# Altium PCB PCB1.PcbDoc
Units mil, origin at the board's own origin, x right, y up, seen from the top; angles counter-clockwise.
Board outline 3950.53 x 3947.04 mil, 2 copper layers (Top Layer, Bottom Layer); 124 components, 0 nets, 427 pads, 87 vias.
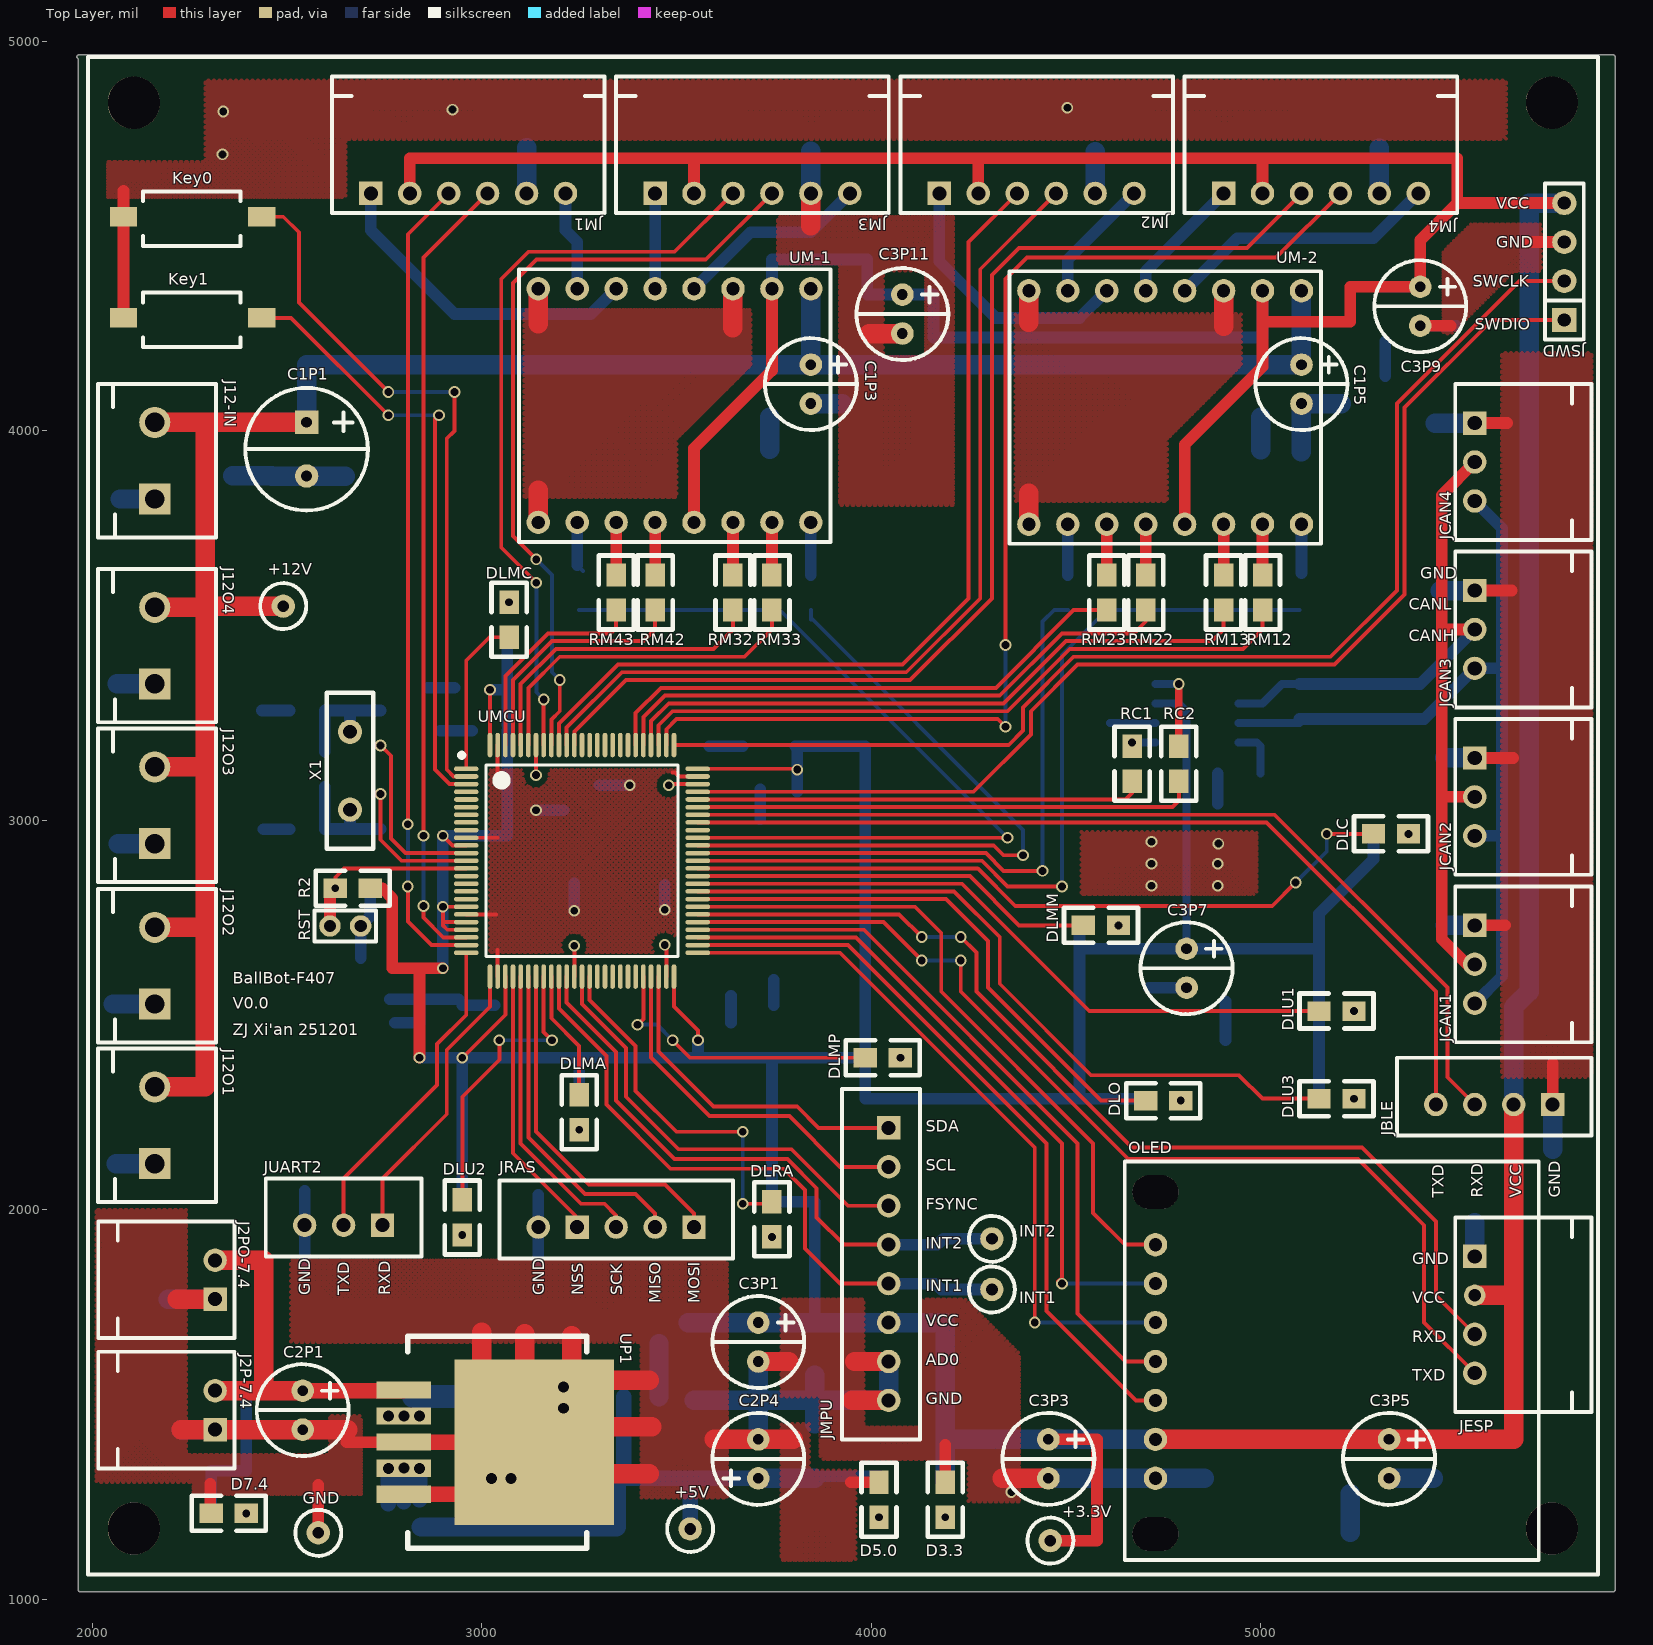
[diagram p0: Top Layer view]
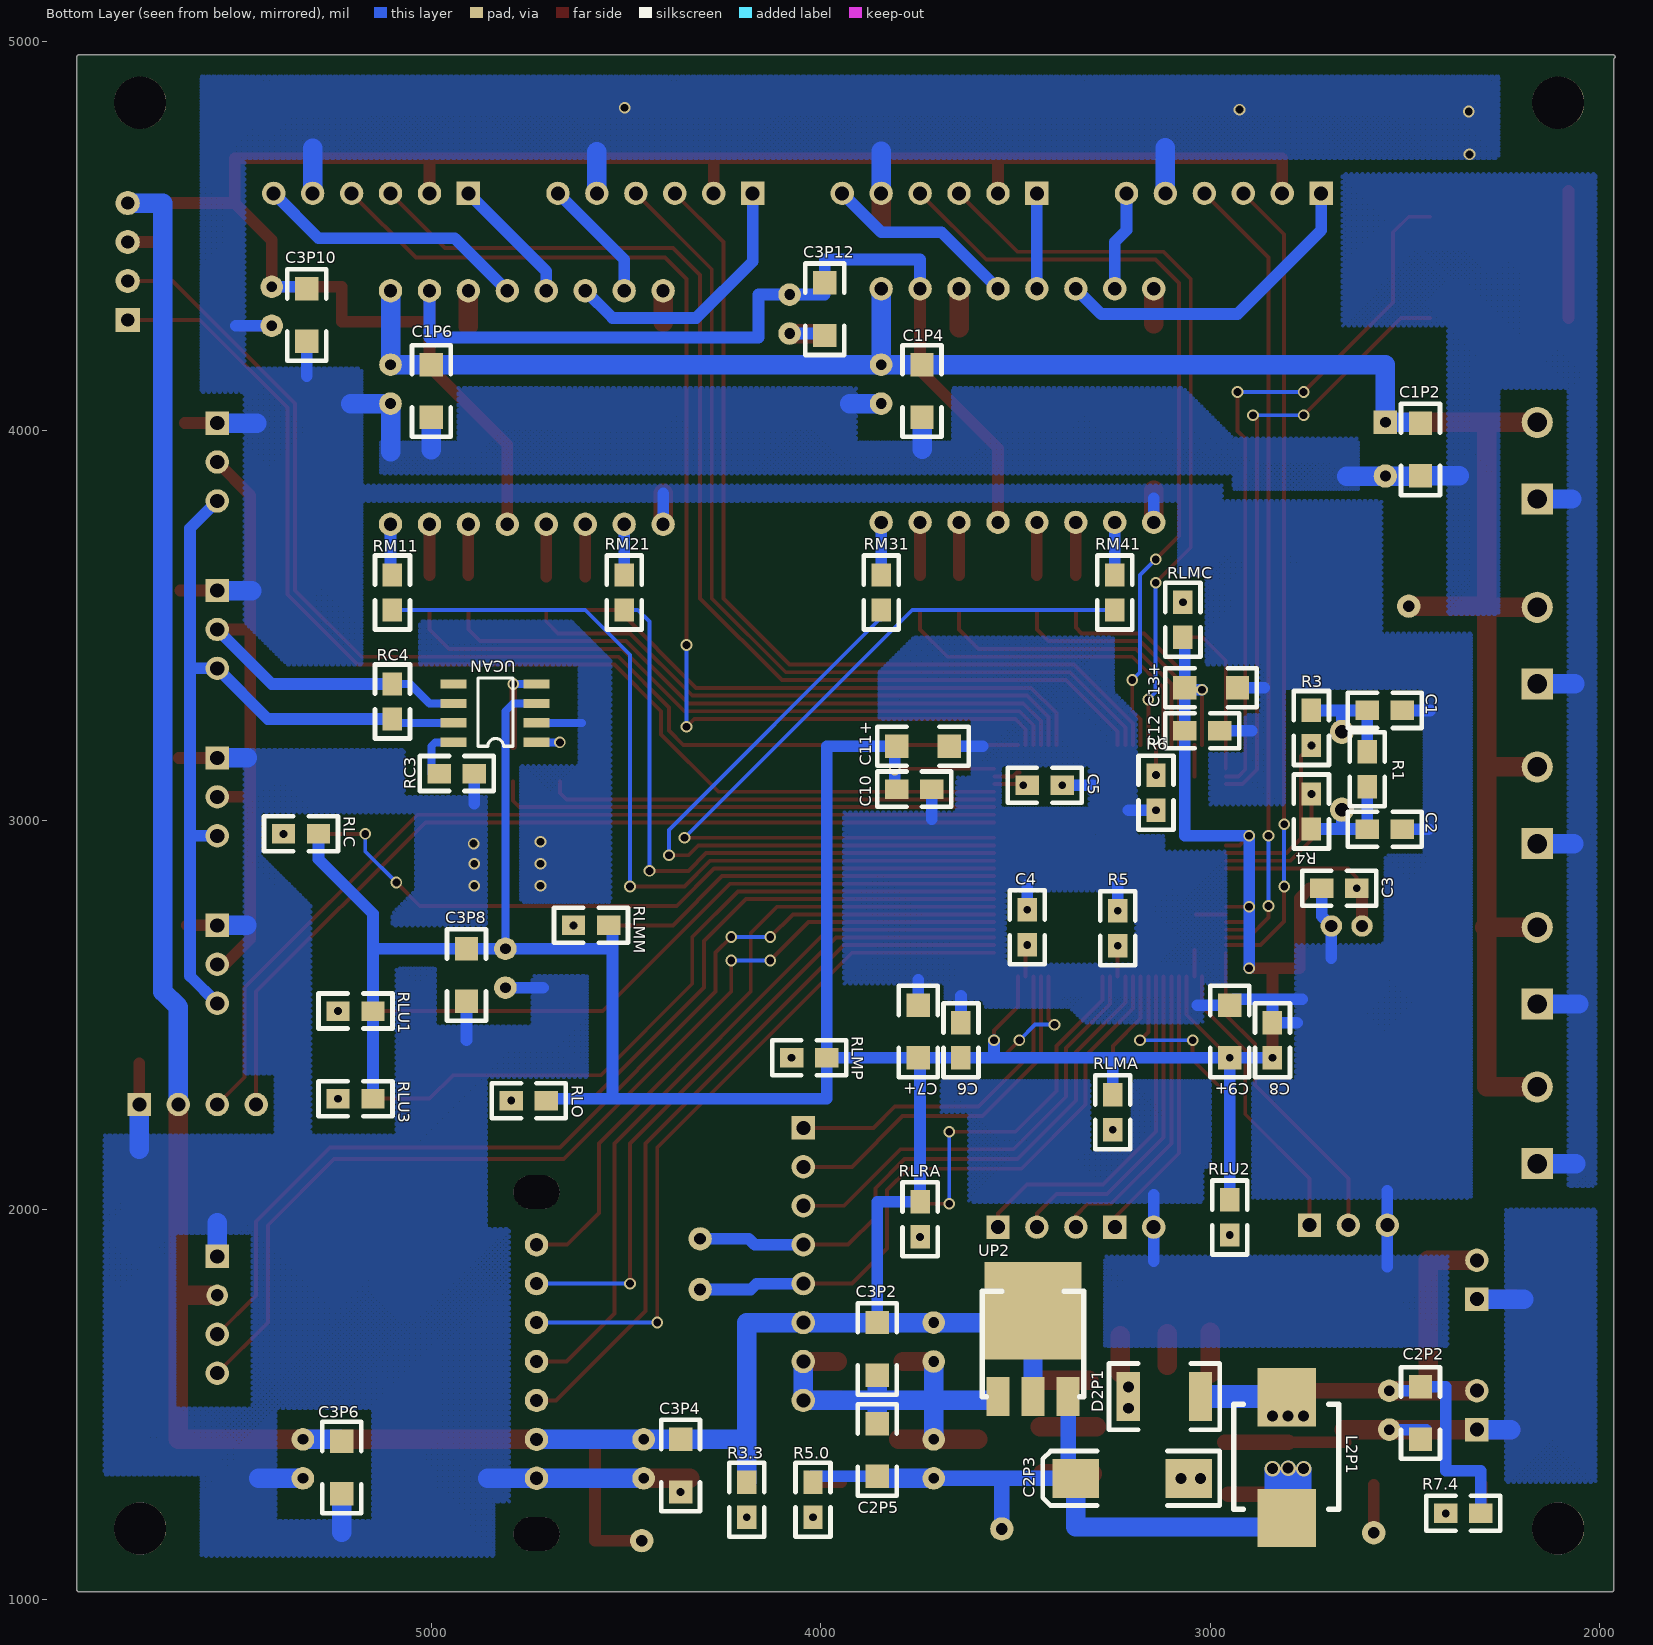
[diagram p1: Bottom Layer view, seen from below]

## Layer stack, top to bottom
Top Solder: solder mask 0.4, Solder Resist, Dk 3.5
Top Layer: signal copper 1.4
Dielectric 1: dielectric 12.6, FR-4, Dk 4.8
Bottom Layer: signal copper 1.4
Bottom Solder: solder mask 0.4, Solder Resist, Dk 3.5

## Board outline
1963.49,1023.62 1963.49,4955.85 cw(c1965,4960.63) 1965,4965.64 5902.01,4965.64 cw(c5902.01,4960.63) 5903.76,4965.33 cw(c5905.51,4960.63) 5910.53,4960.63 5910.53,1023.62 cw(c5905.51,1023.62) 5905.51,1018.61 1968.5,1018.61 cw(c1968.5,1023.62)

## Design rules (kind name [scope] priority, off if disabled: settings)
Clearance [All] p1: gap=10
PolygonConnect [All] p1: connectstyle=Relief reliefconductorwidth=10 reliefentries=4 polygonreliefangle="90 Angle" airgapwidth=10
RoutingVias [All] p1: holewidth=28 width=50 viastyle="Through Hole" minholewidth=28 minwidth=50 maxholewidth=28 maxwidth=50
SolderMaskExpansion [All] p1: expansion=4
Width [All] p1: maxlimit=10 minlimit=10 preferedwidth=10
30 further rules are at their usual default settings.

## Components (designator, comment, footprint, x,y, rotation, side; value= is the part's Value field where it differs from the comment)
+3.3V "Comment" TestDot#1 4460,1150 r0 top
+5V "Comment" TestDot#2 3535,1180 r0 top
+12V "Comment" TestDot#3 2490,3550 r0 top
C1 "Comment" 0805#1 2506.54,3282.09 r0 bottom
C1P1 "Comment" C+8mm 2550,4021.85 r270 top
C1P2 "Comment" 1206#1 2460,4020 r270 bottom
C1P3 "Comment" C+6mm 3845,4170 r270 top
C1P4 "Comment" 1206#1 3740,4170 r270 bottom
C1P5 "Comment" C+6mm 5105,4170 r270 top
C1P6 "Comment" 1206#1 5000,4170 r270 bottom
C2 "Comment" 0805#1 2506.54,2977.09 r0 bottom
C2P1 "Comment" C+6mm 2540,1535 r270 top
C2P2 "Comment" 1206#2 2460,1545 r270 bottom
C2P3 "Comment" 7243 3345,1310 r0 bottom
C2P4 "Comment" C+6mm 3710,1310 r90 top
C2P5 "Comment" 1206#3 3855,1450 r270 bottom
C3 "Comment" 0805#1 2713.74,2825.12 r180 bottom
C3P1 "Comment" C+6mm 3710,1710 r270 top
C3P2 "Comment" 1206#1 3855,1710 r270 bottom
C3P3 "Comment" C+6mm 4455,1410 r270 top
C3P4 "Comment" 1206#1 4360,1410 r270 bottom
C3P5 "Comment" C+6mm 5330,1410 r270 top
C3P6 "Comment" 1206#1 5230,1405 r270 bottom
C3P7 "Comment" C+6mm 4810,2670 r270 top
C3P8 "Comment" 1206#1 4910,2670 r270 bottom
C3P9 "Comment" C+6mm 5410,4370 r270 top
C3P10 "Comment" 1206#1 5320,4365 r270 bottom
C3P11 "Comment" C+6mm 4080,4350 r270 top
C3P12 "Comment" 1206#1 3990,4380 r270 bottom
C4 "Comment" 0805#2 3470,2680 r90 bottom
C5 "Comment" 0805#2 3470,3090 r180 bottom
C6 "Comment" 0805#3 3640,2390 r90 bottom
C7+ "Comment" 1206#4 3750,2390 r90 bottom
C8 "Comment" 0805#2 2840,2390 r90 bottom
C9+ "Comment" 1206#4 2950,2390 r90 bottom
C10 "Comment" 0805#3 3805,3080 r180 bottom
C11+ "Comment" 1206#4 3805,3190 r180 bottom
C12 "Comment" 0805#3 3065,3230 r180 bottom
C13+ "Comment" 1206#4 3065,3340 r180 bottom
D2P1 "Comment" 1812 3025,1520 r0 bottom
D3.3 "Comment" 0805#1 4190,1300 r270 top
D5.0 "Comment" 0805#1 4020,1300 r270 top
D7.4 "Comment" 0805#2 2395,1220 r180 top
DLC "Comment" 0805#4 5290,2965 r0 top
DLMA "Comment" 0805#4 3250,2295 r270 top
DLMC "Comment" 0805#4 3070,3470 r90 top
DLMM "Comment" 0805#4 4545,2730 r0 top
DLMP "Comment" 0805#4 3985,2390 r0 top
DLO "Comment" 0805#4 4705,2280 r0 top
DLRA "Comment" 0805#4 3745,2020 r270 top
DLU1 "Comment" 0805#4 5150,2510 r0 top
DLU2 "Comment" 0805#4 2950,2025 r270 top
DLU3 "Comment" 0805#4 5150,2285 r0 top
GND "Comment" TestDot#4 2580,1170 r0 top
INT1 "Comment" TestDot#5 4310,1795 r0 top
INT2 "Comment" TestDot#5 4310,1925 r0 top
J2P-7.4 "Comment" XH2.54W-2P 2315,1435 r90 top
J2PO-7.4 "Comment" XH2.54W-2P 2315,1770 r90 top
J12-IN "Comment" KF301-2P-5.0 2160,3825 r90 top
J12O1 "Comment" KF301-2P-5.0 2160,2118.15 r90 top
J12O2 "Comment" KF301-2P-5.0 2160,2528.15 r90 top
J12O3 "Comment" KF301-2P-5.0 2160,2940 r90 top
J12O4 "Comment" KF301-2P-5.0 2160,3350 r90 top
JBLE "Comment" SIP4-2.54 5750,2270 r180 top
JCAN1 "Comment" XH2.54W-3P 5550,2730 r270 top
JCAN2 "Comment" XH2.54W-3P 5550,3160 r270 top
JCAN3 "Comment" XH2.54W-3P 5550,3590 r270 top
JCAN4 "Comment" XH2.54W-3P 5550,4020 r270 top
JESP "Comment" XH2.54W-4P 5550,1880 r270 top
JM1 "Comment" XH2.54W-6P 2715,4610 r0 top
JM2 "Comment" XH2.54W-6P 4175,4610 r0 top
JM3 "Comment" XH2.54W-6P 3445,4610 r0 top
JM4 "Comment" XH2.54W-6P 4905,4610 r0 top
JMPU "Comment" SIP8-2.54 4045,2210 r270 top
JRAS "Comment" SIP5-2.54 3545,1955 r180 top
JSWD "Comment" SIP04-2.54 5780,4285 r90 top
JUART2 "Comment" SIP3-2.54 2745,1960 r180 top
Key0 "Comment" SW-3*6*2.5 2080,4550 r0 top
Key1 "Comment" SW-3*6*2.5 2080,4290 r0 top
L2P1 "Comment" 100uH/1A 2800,1365 r270 bottom
OLED "Comment" 0.96OLED 4730,2045 r270 top
R1 "Comment" 0805#4 2596.54,3086.09 r90 bottom
R2 "Comment" 0805#5 2623.74,2825.12 r0 top
R3 "Comment" 0805#4 2740,3192.09 r90 bottom
R3.3 "Comment" 0805#6 4190,1300 r270 bottom
R4 "Comment" 0805#4 2740,3067.48 r270 bottom
R5 "Comment" 0805#2 3237.56,2677.56 r90 bottom
R5.0 "Comment" 0805#7 4020,1300 r270 bottom
R6 "Comment" 0805#1 3139.13,3025.87 r90 bottom
R7.4 "Comment" 0805#8 2395,1220 r180 bottom
RC1 "Comment" 0805#4 4670,3100 r90 top
RC2 "Comment" 0805#4 4790,3100 r90 top
RC3 "Comment" 0805#2 4980,3120 r180 bottom
RC4 "Comment" 0805#4 5100,3350 r270 bottom
RLC "Comment" 0805#6 5290,2965 r0 bottom
RLMA "Comment" 0805#6 3250,2295 r270 bottom
RLMC "Comment" 0805#6 3070,3470 r90 bottom
RLMM "Comment" 0805#6 4545,2730 r0 bottom
RLMP "Comment" 0805#6 3985,2390 r0 bottom
RLO "Comment" 0805#6 4705,2280 r0 bottom
RLRA "Comment" 0805#6 3745,2020 r270 bottom
RLU1 "Comment" 0805#6 5150,2510 r0 bottom
RLU2 "Comment" 0805#6 2950,2025 r270 bottom
RLU3 "Comment" 0805#6 5150,2285 r0 bottom
RM11 "Comment" 0805#4 5100,3630 r270 bottom
RM12 "Comment" 0805#4 5005,3630 r270 top
RM13 "Comment" 0805#4 4905,3630 r270 top
RM21 "Comment" 0805#4 4505,3630 r270 bottom
RM22 "Comment" 0805#4 4705,3630 r270 top
RM23 "Comment" 0805#4 4605,3630 r270 top
RM31 "Comment" 0805#4 3845,3540 r90 bottom
RM32 "Comment" 0805#4 3645,3540 r90 top
RM33 "Comment" 0805#4 3745,3540 r90 top
RM41 "Comment" 0805#4 3245,3540 r90 bottom
RM42 "Comment" 0805#4 3445,3540 r90 top
RM43 "Comment" 0805#4 3345,3540 r90 top
RST "Comment" 2p-2mm 2610,2728.46 r0 top
UCAN "Comment" SOIC-8 4730,3200 r0 bottom
UM-1 "Comment" TB6612 3845,4365 r270 top
UM-2 "Comment" TB6612 5105,4360 r270 top
UMCU "Comment" LQFP-100_L14.0-W14.0-P0.50-LS16.0-BL 2959.99,3132.49 r270 top
UP1 "Comment" LM2596 3070,1405 r270 top
UP2 "Comment" LM1117 3455,1675 r180 bottom
X1 "Comment" XTAL 2661.54,3227.09 r270 top

## Footprints (in the part's own frame and the unit in brackets; to place one, negate y for a bottom-side part, rotate by r counter-clockwise, add the part's x,y. Pads: shape width x height; smd on the part's side, far side on the other; paste and mask are expansions set on the pad)
0.96OLED [mil]
  oval 86.61x118.11 hole 86.61 slot 118.11 at 90 deg: 7(0,0) 7(877.95,0)
  round 60 hole 34: CS(135,0) DC(235,0) GND(735,0) RES(335,0) SCK(535,0) SDA(435,0) VCC(635,0)
  silkscreen extent -79,-79 945,984
2p-2mm [mm]
  round 1.4 hole 0.8: 1(0,0) GND(2,0)
  silkscreen extent -1,-1 3,1
100uH/1A [mil]
  rect 150x150 smd: 0(157,-3) 1(-153,-3)
  silkscreen extent -135,-140 135,130
0805#1 [mil]
  rect 60x50 smd: 2(90,0) GND(0,0)
  silkscreen extent -50,-45 140,45
0805#2 [mil]
  rect 60x50 smd: 1(0,0) GND(90,0)
  silkscreen extent -50,-45 140,45
0805#3 [mil]
  rect 60x50 smd: +3.3V(0,0) GND(90,0)
  silkscreen extent -50,-45 140,45
0805#4 [mil]
  rect 60x50 smd: 1(0,0) 2(90,0)
  silkscreen extent -50,-45 140,45
0805#5 [mil]
  rect 60x50 smd: 1(0,0) +3.3V(90,0)
  silkscreen extent -50,-45 140,45
0805#6 [mil]
  rect 60x50 smd: 2(90,0) +3.3V(0,0)
  silkscreen extent -50,-45 140,45
0805#7 [mil]
  rect 60x50 smd: 2(90,0) +5V(0,0)
  silkscreen extent -50,-45 140,45
0805#8 [mil]
  rect 60x50 smd: 7.4V(90,0) +7.4V(0,0)
  silkscreen extent -50,-45 140,45
1206#1 [mil]
  rect 60x60 smd: 1(0,0) GND(135,0)
  silkscreen extent -50,-50 185,50
1206#2 [mil]
  rect 60x60 smd: 1(0,0) 2(135,0)
  silkscreen extent -50,-50 185,50
1206#3 [mil]
  rect 60x60 smd: 2(135,0) GND(0,0)
  silkscreen extent -50,-50 185,50
1206#4 [mil]
  rect 60x60 smd: +3.3V(0,0) GND(135,0)
  silkscreen extent -50,-50 185,50
1812 [mil]
  rect 60x125 smd: 1(0,0) GND(185,0)
  silkscreen extent -50,-85 235,85
7243 [mil]
  rect 120x100 smd: +5V(0,0) GND(-290,0)
  silkscreen extent -370,-70 85,70
C+6mm [mil]
  round 58 hole 27.56: +(0,0) -(100,0)
  silkscreen extent -68,-118 168,118
C+8mm [mil]
  rect 60x60 hole 27.56: 1(0,0)
  round 60 hole 27.56: 2(137.8,0)
  silkscreen extent -89,-157 226,157
KF301-2P-5.0 [mil]
  round 80 hole 50: +(196.85,0)
  rect 80x80 hole 50: GND(0,0)
  silkscreen extent -98,-157 295,146
LM1117 [mil]
  rect 60x100 smd: +3.3V(0,-155) +VIn(90,-155) GND(-90,-155)
  rect 250x250 smd: Vout(0,65)
  silkscreen extent -130,-155 130,115
LM2596 [mil]
  rect 44x140 smd: +5V(-65,-270) +Vin(-132,-270) FB(69,-270) GND(2,-270) O\N\/OFF(136,-270)
  rect 425x410 smd: GND(3,65)
  silkscreen extent -270,-260 275,200
LQFP-100_L14.0-W14.0-P0.50-LS16.0-BL [mm]
  oval 0.3x1.6 smd paste+0 mask+0.051: 1(0.008,0) 2(0.508,0) 3(1.008,0) 4(1.508,0) 5(2.008,0) 6(2.508,0) 7(3.008,0) 8(3.508,0) 9(4.008,0) 10(4.508,0) 11(5.008,0) 12(5.509,0) 13(6.008,0) 14(6.509,0) 15(7.008,0) 16(7.509,0) 17(8.008,0) 18(8.509,0) 19(9.008,0) 20(9.509,0) 21(10.008,0) 22(10.509,0) 23(11.008,0) 24(11.509,0) 25(12.008,0) 51(12.008,15.1) 52(11.509,15.1) 53(11.008,15.1) 54(10.509,15.1) 55(10.008,15.1) 56(9.509,15.1) 57(9.008,15.1) 58(8.509,15.1) 59(8.008,15.1) 60(7.509,15.1) 61(7.008,15.1) 62(6.509,15.1) 63(6.008,15.1) 64(5.509,15.1) 65(5.008,15.1) 66(4.508,15.1) 67(4.008,15.1) 68(3.508,15.1) 69(3.008,15.1) 70(2.508,15.1) 71(2.008,15.1) 72(1.508,15.1) 73(1.008,15.1) 74(0.508,15.1) 75(0.008,15.1)
  oval 1.6x0.3 smd paste+0 mask+0.051: 26(13.558,1.55) 27(13.558,2.05) 28(13.558,2.55) 29(13.558,3.05) 30(13.558,3.55) 31(13.558,4.05) 32(13.558,4.55) 33(13.558,5.05) 34(13.558,5.55) 35(13.558,6.05) 36(13.558,6.55) 37(13.558,7.05) 38(13.558,7.55) 39(13.558,8.05) 40(13.558,8.55) 41(13.558,9.05) 42(13.558,9.55) 43(13.558,10.05) 44(13.558,10.55) 45(13.558,11.05) 46(13.558,11.55) 47(13.558,12.05) 48(13.558,12.55) 49(13.558,13.05) 50(13.558,13.55) 76(-1.541,13.55) 77(-1.541,13.05) 78(-1.541,12.55) 79(-1.541,12.05) 80(-1.541,11.55) 81(-1.541,11.05) 82(-1.541,10.55) 83(-1.541,10.05) 84(-1.541,9.55) 85(-1.541,9.05) 86(-1.541,8.55) 87(-1.541,8.05) 88(-1.541,7.55) 89(-1.541,7.05) 90(-1.541,6.55) 91(-1.541,6.05) 92(-1.541,5.55) 93(-1.541,5.05) 94(-1.541,4.55) 95(-1.541,4.05) 96(-1.541,3.55) 97(-1.541,3.05) 98(-1.541,2.55) 99(-1.541,2.05) 100(-1.541,1.55)
  silkscreen extent -1.02,-0.45 12.26,13.8
SIP3-2.54 [mil]
  round 60 hole 36: GND(200,0) TX(100,0)
  rect 60x60 hole 36: RX(0,0)
  silkscreen extent -100,-120 300,80
SIP4-2.54 [mil]
  round 60 hole 36: 3(200,0) 4(300,0) +3.3V(100,0)
  rect 60x60 hole 36: GND(0,0)
  silkscreen extent -100,-120 400,80
SIP04-2.54 [mil]
  rect 62x62 hole 34: 1(0,0)
  round 62 hole 34: 2(100,0) +3.3v(300,0) GND(200,0)
  silkscreen extent -50,-50 350,50
SIP5-2.54 [mil]
  round 60 hole 36: GND(400,0) MISO(100,0) SCK(200,0)
  rect 60x60 hole 36: MOSI(0,0) NSS(300,0)
  silkscreen extent -100,-120 500,80
SIP8-2.54 [mil]
  round 60 hole 36: AD0(600,0) FSYNC(200,0) GND(700,0) INT1(400,0) INT2(300,0) SCL(100,0) VCC(500,0)
  rect 60x60 hole 36: SDA(0,0)
  silkscreen extent -100,-120 800,80
SOIC-8 [mil]
  rect 67x24 smd: 1(0,0) 4(0,-150) 5(213,-150) 6(213,-100) 7(213,-50) 8(213,0) GND(0,-50) VCC(0,-100)
  silkscreen extent 60,-165 150,10
SW-3*6*2.5 [mil]
  rect 70x50 smd: 1(355,0) GND(0,0)
  silkscreen extent 50,-75 300,65
TB6612 [mil]
  round 60 hole 34: AIN1(600,-200) AIN2(600,-100) AO1(0,-300) AO2(0,-400) BIN1(600,-400) BIN2(600,-500) BO1(0,-600) BO2(0,-500) GND(0,-200) GND(0,-700) GND(600,-700) PWMA(600,0) PWMB(600,-600) STBY(600,-300) VCC(0,-100) VM(0,0)
  silkscreen extent -50,-750 650,50
TestDot#1 [mil]
  round 60 hole 30: +3.3V(0,0)
  silkscreen extent -59,-59 59,59
TestDot#2 [mil]
  round 60 hole 30: +5V(0,0)
  silkscreen extent -59,-59 59,59
TestDot#3 [mil]
  round 60 hole 30: +12V(0,0)
  silkscreen extent -59,-59 59,59
TestDot#4 [mil]
  round 60 hole 30: GND(0,0)
  silkscreen extent -59,-59 59,59
TestDot#5 [mil]
  round 60 hole 30: 4(0,0)
  silkscreen extent -59,-59 59,59
XH2.54W-2P [mil]
  round 60 hole 36: +(100,0)
  rect 60x60 hole 36: GND(0,0)
  silkscreen extent -100,-50 200,300
XH2.54W-3P [mil]
  round 60 hole 36: 2(100,0) 3(200,0)
  rect 60x60 hole 36: GND(0,0)
  silkscreen extent -100,-50 300,300
XH2.54W-4P [mil]
  round 60 hole 36: 3(200,0) 4(300,0)
  rect 60x60 hole 36: GND(0,0)
  round 55.12 hole 31.5: VCC(100,0)
  silkscreen extent -100,-50 400,300
XH2.54W-6P [mil]
  round 60 hole 36: +(500,0) +3.3(100,0) A(200,0) B(300,0) GND(400,0)
  rect 60x60 hole 36: -(0,0)
  silkscreen extent -100,-50 600,300
XTAL [mil]
  round 62 hole 35.43: 1(0,0) 2(200,0)
  silkscreen extent -100,-60 300,60

## Free pads (board coordinates)
  round 133.86 hole 133.86: 2(2106.3,1181.1) 2(2106.3,4842.52) 2(5748.03,1181.1) 2(5748.03,4842.52)

## Via types
v1: diameter 30, hole 20, Top Layer to Bottom Layer, 77 vias
v2: diameter 40, hole 28, Top Layer to Bottom Layer, 10 vias

## Nets (pads, with @x,y where several pads share a name; then routed paths per layer and width w, separated by ;. In a path a pad name is that pad's centre, name@x,y a point inside that pad or via, vN(x,y) a via of type N, cw(c..) or ccw(c..) an arc to the next point about the centre after c; other vN are vias at no path point)
pads on no net: +3.3V.+3.3V +5V.+5V +12V.+12V C1.2 C1.GND C1P1.1 C1P1.2 C1P2.1 C1P2.GND C1P3.+ C1P3.- C1P4.1 C1P4.GND C1P5.+ C1P5.- C1P6.1 C1P6.GND C2.2 C2.GND C2P1.+ C2P1.- C2P2.1 C2P2.2 C2P3.+5V C2P3.GND C2P4.+ C2P4.- C2P5.2 C2P5.GND C3.2 C3.GND C3P1.+ C3P1.- C3P2.1 C3P2.GND C3P3.+ C3P3.- C3P4.1 C3P4.GND C3P5.+ C3P5.- C3P6.1 C3P6.GND C3P7.+ C3P7.- C3P8.1 C3P8.GND C3P9.+ C3P9.- C3P10.1 C3P10.GND C3P11.+ C3P11.- C3P12.1 C3P12.GND C4.1 C4.GND C5.1 C5.GND C6.+3.3V C6.GND C7+.+3.3V C7+.GND C8.1 C8.GND C9+.+3.3V C9+.GND C10.+3.3V C10.GND C11+.+3.3V C11+.GND C12.+3.3V C12.GND C13+.+3.3V C13+.GND D2P1.1 D2P1.GND D3.3.2 D3.3.GND D5.0.2 D5.0.GND D7.4.1 D7.4.GND DLC.1 DLC.2 DLMA.1 DLMA.2 DLMC.1 DLMC.2 DLMM.1 DLMM.2 DLMP.1 DLMP.2 DLO.1 DLO.2 DLRA.1 DLRA.2 DLU1.1 DLU1.2 DLU2.1 DLU2.2 DLU3.1 DLU3.2 GND.GND INT1.4 INT2.4 J2P-7.4.+ J2P-7.4.GND J2PO-7.4.+ J2PO-7.4.GND J12-IN.+ J12-IN.GND J12O1.+ J12O1.GND J12O2.+ J12O2.GND J12O3.+ J12O3.GND J12O4.+ J12O4.GND JBLE.3 JBLE.4 JBLE.+3.3V JBLE.GND JCAN1.2 JCAN1.3 JCAN1.GND JCAN2.2 JCAN2.3 JCAN2.GND JCAN3.2 JCAN3.3 JCAN3.GND JCAN4.2 JCAN4.3 JCAN4.GND JESP.3 JESP.4 JESP.GND JESP.VCC JM1.+ JM1.+3.3 JM1.- JM1.A JM1.B JM1.GND JM2.+ JM2.+3.3 JM2.- JM2.A JM2.B JM2.GND JM3.+ JM3.+3.3 JM3.- JM3.A JM3.B JM3.GND JM4.+ JM4.+3.3 JM4.- JM4.A JM4.B JM4.GND JMPU.AD0 JMPU.FSYNC JMPU.GND JMPU.INT1 JMPU.INT2 JMPU.SCL JMPU.SDA JMPU.VCC JRAS.GND JRAS.MISO JRAS.MOSI JRAS.NSS JRAS.SCK JSWD.1 JSWD.2 JSWD.+3.3v JSWD.GND JUART2.GND JUART2.RX JUART2.TX Key0.1 Key0.GND Key1.1 Key1.GND L2P1.0 L2P1.1 OLED.7 OLED.CS OLED.DC OLED.GND OLED.RES OLED.SCK OLED.SDA OLED.VCC R1.1 R1.2 R2.1 R2.+3.3V R3.1 R3.2 R3.3.2 R3.3.+3.3V R4.1 R4.2 R5.0.2 R5.0.+5V R5.1 R5.GND R6.2 R6.GND R7.4.7.4V R7.4.+7.4V RC1.1 RC1.2 RC2.1 RC2.2 RC3.1 RC3.GND RC4.1 RC4.2 RLC.2 RLC.+3.3V RLMA.2 RLMA.+3.3V RLMC.2 RLMC.+3.3V RLMM.2 RLMM.+3.3V RLMP.2 RLMP.+3.3V RLO.2 RLO.+3.3V RLRA.2 RLRA.+3.3V RLU1.2 RLU1.+3.3V RLU2.2 RLU2.+3.3V RLU3.2 RLU3.+3.3V RM11.1 RM11.2 RM12.1 RM12.2 RM13.1 RM13.2 RM21.1 RM21.2 RM22.1 RM22.2 RM23.1 RM23.2 RM31.1 RM31.2 RM32.1 RM32.2 RM33.1 RM33.2 RM41.1 RM41.2 RM42.1 RM42.2 RM43.1 RM43.2 RST.1 RST.GND UCAN.1 UCAN.4 UCAN.5 UCAN.6 UCAN.7 UCAN.8 UCAN.GND UCAN.VCC UM-1.AIN1 UM-1.AIN2 UM-1.AO1 UM-1.AO2 UM-1.BIN1 UM-1.BIN2 UM-1.BO1 UM-1.BO2 UM-1.GND UM-1.PWMA UM-1.PWMB UM-1.STBY UM-1.VCC UM-1.VM UM-2.AIN1 UM-2.AIN2 UM-2.AO1 UM-2.AO2 UM-2.BIN1 UM-2.BIN2 UM-2.BO1 UM-2.BO2 UM-2.GND UM-2.PWMA UM-2.PWMB UM-2.STBY UM-2.VCC UM-2.VM UMCU.1 UMCU.2 UMCU.3 UMCU.4 UMCU.5 UMCU.6 UMCU.7 UMCU.8 UMCU.9 UMCU.10 UMCU.11 UMCU.12 UMCU.13 UMCU.14 UMCU.15 UMCU.16 UMCU.17 UMCU.18 UMCU.19 UMCU.20 UMCU.21 UMCU.22 UMCU.23 UMCU.24 UMCU.25 UMCU.26 UMCU.27 UMCU.28 UMCU.29 UMCU.30 UMCU.31 UMCU.32 UMCU.33 UMCU.34 UMCU.35 UMCU.36 UMCU.37 UMCU.38 UMCU.39 UMCU.40 UMCU.41 UMCU.42 UMCU.43 UMCU.44 UMCU.45 UMCU.46 UMCU.47 UMCU.48 UMCU.49 UMCU.50 UMCU.51 UMCU.52 UMCU.53 UMCU.54 UMCU.55 UMCU.56 UMCU.57 UMCU.58 UMCU.59 UMCU.60 UMCU.61 UMCU.62 UMCU.63 UMCU.64 UMCU.65 UMCU.66 UMCU.67 UMCU.68 UMCU.69 UMCU.70 UMCU.71 UMCU.72 UMCU.73 UMCU.74 UMCU.75 UMCU.76 UMCU.77 UMCU.78 UMCU.79 UMCU.80 UMCU.81 UMCU.82 UMCU.83 UMCU.84 UMCU.85 UMCU.86 UMCU.87 UMCU.88 UMCU.89 UMCU.90 UMCU.91 UMCU.92 UMCU.93 UMCU.94 UMCU.95 UMCU.96 UMCU.97 UMCU.98 UMCU.99 UMCU.100 UP1.+5V UP1.+Vin UP1.FB UP1.GND UP1.O\N\/OFF UP2.+3.3V UP2.+VIn UP2.GND UP2.Vout X1.1 X1.2
copper on no net: | length 146229.2
  Top Layer w10: 2435,4290 2510,4290 v1(2760,4040) ; 2435,4550 2490,4550 2530,4510 2530,4330 v1(2760,4100) ; v1(2623.74,2825.12) 2623.74,2853.74 2646.25,2876.25 2960,2876.25 ; 2645,1960 2645,2080 2885,2320 2885,2425 2960,2500 2960,2659.72 ; v1(2740,3067.48) 2740,2949.88 2793.94,2895.94 2960,2895.94 ; v1(2740,3192.09) 2766.54,3165.55 2766.54,2953.35 2804.26,2915.62 2960,2915.62 ; 2745,1960 2745,2080 2910,2245 2910,2410 3021.02,2521.02 3021.02,2598.7 ; v1(2810,2830) 2810,2740 2870.6,2679.4 2960,2679.4 ; v1(2810,2990) 2810,4505 2915,4610 ; v1(2850,2780) 2850,2750 2900.91,2699.09 2960,2699.09 ; v1(2850,2960) 2850,4445 3015,4610 ; v1(2890,4040) 2880,4030 2880,3130 2917.21,3092.79 2960,3092.79 ; 2900,2738.46 2960,2738.46 ; v1(2900,2960) 2924.69,2935.31 2960,2935.31 ; v1(2930,4100) 2930,4000 2910,3980 2910,3130 2927.52,3112.48 2960,3112.48 ; 2950,2025 2950,2290 3045,2385 v1(3045,2435) ; v1(2950,2390) 3060.39,2500.39 3060.39,2598.7 ; 2960,2718.77 2911.23,2718.77 2900,2730 v1(2900,2777.83) 2960,2777.83 ; 2960,2758.14 3036.42,2758.14 ; 2960,2955 3039.85,2955 ; 2960,3132.16 2960,3410 3020,3470 3070,3470 ; 3021.02,3193.18 v1(3021.02,3335) ; 3040.7,2598.7 3040.7,2667.28 ; 3040.7,3112.53 3040.7,3193.18 ; 3060.39,3193.18 3060.39,3370.39 3170,3480 3330,3480 3345,3495 3345,3540 ; 3080.07,2598.7 3080.07,2144.93 3245,1980 3245,1955 ; 3080.07,3193.18 3080.07,3360.07 3180,3460 3415,3460 3445,3490 3445,3540 ; 3099.76,2598.7 3099.76,2170.24 3255,2015 3315,2015 3345,1985 3345,1955 ; 3099.76,3193.18 3099.76,3349.76 3190,3440 3595,3440 3645,3490 3645,3540 ; 3119.44,2598.7 3119.44,2185.56 3265,2040 3395,2040 3445,1990 3445,1955 ; 3119.44,3193.18 3119.44,3339.44 3200,3420 3675,3420 3745,3490 3745,3540 ; 3139.13,2598.7 3139.13,2200.87 3275,2065 3470,2065 3545,1990 3545,1955 ; v1(3139.13,3115.87) 3139.13,3193.18 ; v1(3140,3610) 3050,3700 3050,4390 3120,4460 3495,4460 3645,4610 ; v1(3140,3670) 3080,3730 3080,4380 3140,4440 3575,4440 3745,4610 ; 3158.81,2598.7 3158.81,2456.19 v1(3180,2435) ; 3158.81,3193.18 v1(3158.81,3310) ; 3178.5,2598.7 3178.5,2491.5 3250,2420 3250,2295 ; 3178.5,3193.18 3178.5,3258.5 3200,3280 v1(3200,3360) ; 3198.18,2598.7 3198.18,2516.82 3320,2395 3320,2270 3485,2105 3775,2105 3830,2050 3830,1900 3920,1810 4045,1810 ; 3198.18,3193.18 3198.18,3248.18 3350,3400 4080,3400 4250,3570 4250,4485 4375,4610 ; 3217.87,2598.7 3217.87,2532.13 3345,2405 3345,2280 3495,2130 3785,2130 3860,2055 3860,1980 3930,1910 4045,1910 ; 3217.87,3193.18 3217.87,3237.87 3360,3380 4090,3380 4280,3570 4280,4415 4475,4610 ; 3237.56,2598.7 v1(3237.56,2677.56) ; 3237.56,3217.56 3237.56,3193.18 3237.56,3227.56 3370,3360 4100,3360 4310,3570 4310,4400 4380,4470 4965,4470 5105,4610 ; 3257.24,2598.7 3257.24,2527.76 3370,2415 3370,2290 3505,2155 3795,2155 3940,2010 4045,2010 ; 3276.93,2598.7 3276.93,2538.07 3395,2420 3395,2305 3500,2200 v1(3670,2200) ; 3395.04,3193.18 3395.04,3275.04 3460,3340 4320,3340 4520,3540 4605,3540 ; v1(3400,2475) 3414.72,2489.72 3414.72,2598.7 ; 3414.72,3193.18 3414.72,3264.72 3470,3320 4330,3320 4490,3480 4675,3480 4705,3510 4705,3540 ; 3434.41,2598.7 3434.41,2390.59 3585,2240 3790,2240 3920,2110 4045,2110 ; 3434.41,3193.18 3434.41,3254.41 3480,3300 4340,3300 4500,3460 4875,3460 4905,3490 4905,3540 ; 3454.09,2598.7 3454.09,2405.91 3595,2265 3810,2265 3865,2210 4045,2210 ; 3454.09,3193.18 3454.09,3244.09 3490,3280 4350,3280 4510,3440 4955,3440 5005,3490 5005,3540 ; v1(3470,2680) 3473.78,2676.22 3473.78,2598.7 ; 3473.78,3193.18 3473.78,3233.78 3500,3260 4325,3260 v1(4345,3240) ; v1(3480,3090) 3482.79,3092.79 3554.48,3092.79 ; v1(3490,2435) 3535,2390 3985,2390 ; 3490.15,3122.45 3496.07,3122.45 3506.04,3112.48 3554.48,3112.48 ; 3493.46,2598.7 3493.46,2521.54 3555,2460 v1(3555,2435) ; 3493.46,3193.18 4353.18,3193.18 4390,3230 4390,3290 4520,3420 5180,3420 5350,3590 5350,4070 5665,4385 5780,4385 ; 3554.48,2659.72 3920.28,2659.72 4420,2160 v1(4420,1710) ; 3554.48,2679.4 3940.6,2679.4 4450,2170 4450,1740 4680,1510 4730,1510 ; 3554.48,2699.09 3960.91,2699.09 4490,2170 v1(4490,1810) ; 3554.48,2718.77 3981.23,2718.77 4530,2170 4530,1733.19 4653.19,1610 4730,1610 ; 3554.48,2738.46 4031.54,2738.46 v1(4130,2640) ; 3554.48,2758.14 4071.86,2758.14 v1(4130,2700) ; 3554.48,2777.83 4112.17,2777.83 4180,2710 4180,2560 4570,2170 4570,1991.26 4651.26,1910 4730,1910 ; 3554.48,2797.51 4192.49,2797.51 4300,2690 4300,2570 4590,2280 4705,2280 ; 3554.48,2817.2 4212.8,2817.2 4330,2700 4330,2580 4565,2345 4945,2345 5005,2285 5150,2285 ; 3554.48,2836.88 4233.12,2836.88 4560,2510 5150,2510 ; 3554.48,2856.57 4253.43,2856.57 4380,2730 4545,2730 ; 3554.48,2876.25 4273.75,2876.25 4370,2780 5030,2780 v1(5090,2840) ; 3554.48,2895.94 4284.06,2895.94 4350,2830 v1(4490,2830) ; 3554.48,2915.62 4294.38,2915.62 4340,2870 v1(4440,2870) ; 3554.48,2935.31 4314.69,2935.31 4340,2910 v1(4390,2910) ; 3554.48,2955 v1(4350,2955) ; 3554.48,2994.37 5015.63,2994.37 5450,2560 5450,2270 ; 3554.48,3014.05 5035.95,3014.05 5480,2570 5480,2340 5550,2270 ; 3554.48,3033.74 4773.74,3033.74 4790,3050 4790,3100 ; 3554.48,3053.42 4653.42,3053.42 4670,3070 4670,3100 ; 3554.48,3073.11 4263.11,3073.11 4410,3220 4410,3280 4530,3400 5190,3400 5370,3580 5370,4060 5595,4285 5780,4285 ; 3554.48,3132.16 3807.84,3132.16 v1(3810,3130) ; v1(3670,2015) 3740,2015 ; v1(4230,2640) 4230,2560 4660,2130 5250,2130 5420,1960 5420,1710 5550,1580 ; v1(4230,2700) 4270,2660 4270,2560 4670,2160 5260,2160 5450,1970 5450,1780 5550,1680 ; v1(4345,3450) 4345,4390 4400,4445 5040,4445 5205,4610 ; v1@4480,1815 4490,1825 ; v1(5170,2965) 5290,2965
  Top Layer w20: 4790,3190 v1(4790,3350)
  Top Layer w30: 2080,4290 2080,4550 2080,4616.63 ; 2302.96,1220 2302.96,1296.24 ; 2580,1170 2580,1293.07 ; 2610,2728.46 v1@2610,2825 ; 2652.49,1403 2800,1403 ; 2713.74,2825.12 2744.88,2825.12 2770,2800 2770,2620 v1(2900,2620) ; 2815,4610 2815,4700 5005,4700 ; v1(2840,2390) 2840,2620 ; 3345,3630 3345,3765 ; 3445,3630 3445,3765 ; 3545,3765 3545,3955 3745,4155 3745,4365 ; 3545,4610 3545,4700 ; 3645,3630 3645,3765 ; 3745,3630 3745,3765 ; 3947.41,1300 4020,1300 ; 4190,1300 4190,1396.14 ; 4275,4610 4275,4700 ; 4455,1410 4580,1410 4580,1150 4460,1150 ; 4605,3625 4605,3760 ; 4705,3625 4705,3760 ; 4805,3760 4805,3965 5005,4165 5005,4360 ; 4905,3630 4905,3760 ; 5005,3630 5005,3760 ; 5005,4280 5230,4280 5230,4370 5410,4370 5410,4490 5505,4585 ; 5005,4610 5005,4700 ; 5410,4270 5488.07,4270 ; 5470,3060 5550,3060 ; 5470,3490 5550,3490 ; 5530,2630 5465,2695 5465,3835 5550,3920 ; 5550,2730 5628,2730 ; 5550,3160 5649.02,3160 ; 5550,3590 5644.81,3590 ; 5550,4020 5633.65,4020 ; 5687.08,4485 5780,4485 ; 5750,2270 5750,2375.83 ; 5770,4585 5505,4585 ; 5005,4700 5505,4700 5505,4585
  Top Layer w40: 2540,1535 2798,1535 ; 2800,1269 2954,1269 ; 2800,1403 2963,1403
  Top Layer w50: 2160,2315 2290,2315 2290,4021.85 ; 2160,2725 2295,2725 ; 2160,3136.85 2286.85,3136.85 ; 2160,3546.85 2290,3546.85 ; 2160,4021.85 2550,4021.85 ; 2218.08,1770 2315,1770 ; 2227.81,1435 2315,1435 2540,1435 2655.37,1435 ; 2293.15,3550 2490,3550 ; 2315,1535 2540,1535 ; 2315,1870 2440,1870 2440,1535 ; 3000,1580 3000,1684.78 ; 3110,1600 3110,1681.64 ; 3145,3765 3145,3847.89 ; 3145,4275 3145,4365 ; 3231.48,1581.48 3231.48,1675.84 ; 3292.5,1442.5 3436.54,1442.5 ; 3302.29,1322.29 3429.47,1322.29 ; 3312.17,1562.17 3430,1562.17 ; 3596.32,1410 3710,1410 3799.98,1410 ; 3645,4265 3645,4365 ; 3710,1610 3787.89,1610 ; 3845,4527.14 3845,4610 ; 3951.14,1510 4045,1510 ; 3957.59,1610 4045,1610 ; 3995,4250 4080,4250 ; 4336.42,1310 4455,1310 ; 4405,3760 4405,3839.31 ; 4405,4278.27 4405,4360 ; 4730,1410 5650,1410 5650,2270 ; 4905,4269.1 4905,4360 ; 5550,1780 5650,1780
  Bottom Layer w10: v1(2760,4040) v1(2890,4040) ; v1(2760,4100) v1(2930,4100) ; 2760,4150 2930,4150 ; 2770,2487.16 2777.16,2480 ; v1(2810,2830) v1(2810,2990) ; 2840,1180 2845,1185 ; v1(2850,2780) v1(2850,2960) ; 2945,2530 2950,2525 ; v1(3045,2435) v1(3180,2435) ; v1(3140,3610) 3140,3328.81 v1(3158.81,3310) ; v1(3140,3670) 3180,3630 3180,3380 v1(3200,3360) ; 3245,3655 3260,3640 ; 3250,3540 3765,3540 v1(4350,2955) ; v1(3400,2475) 3450,2475 v1(3490,2435) ; v1(3670,2015) v1(3670,2200) ; 3845,3515 3845,3540 3845,3520 4390,2975 v1(4390,2910) ; v1(4130,2640) v1(4230,2640) ; v1(4130,2700) v1(4230,2700) ; v1(4345,3240) v1(4345,3450) ; v1(4420,1710) 4730,1710 ; v1(4440,2870) 4440,3510 4470,3540 4505,3540 ; v1(4490,1810) 4730,1810 ; v1(4490,2830) 4490,3425 4605,3540 5100,3540 ; v1(5090,2840) 5170,2920 v1(5170,2965)
  Bottom Layer w20: 4613.03,3250 4730,3250 ; v1(4670,3200) 4730,3200 ; 4730,3300 4790,3300 4810,3280 4810,2670 ; 4730,3350 v1(4790,3350) ; 4943,3200 4990,3200 5000,3190 5000,3120 ; 4943,3250 5100,3250 ; 4943,3300 5005,3300 5055,3350 5100,3350
  Bottom Layer w30: 2305,1220 2305,1329.19 2394.19,1329.19 ; 2395,1329.19 2395,1545 2460,1545 ; 2435.51,3282.09 2506.54,3282.09 ; 2439.35,2977.09 2506.54,2977.09 ; 2445,1435 2540,1435 ; 2465,1535 2540,1535 ; 2545,1853.2 2545,1960 2545,2048.81 ; 2596.54,2977.09 2596.54,3086.09 ; 2596.54,3176.09 2596.54,3282.09 2740,3282.09 ; 2596.93,2977.48 2740,2977.48 ; 2661.54,2982.48 2661.54,3027.09 ; 2661.54,3227.09 2661.54,3277.09 ; 2688.74,2646.31 2688.74,2728.46 2713.74,2753.46 2713.74,2825.12 ; 2715,4610 2715,4515 2930,4300 3280,4300 3345,4365 ; 2763.3,2540 2940,2540 ; 2777.16,2480 2840,2480 2840,2540 ; v1(2840,2390) v1(2950,2390) 2950,2025 ; 2860.83,3340 2930,3340 ; 2893.54,3230 2975,3230 ; v1(2900,2620) v1(2900,2777.83) v1(2900,2960) 3065,2960 3065,3230 ; v1@2945,2390 3715,2390 ; 2950,2525 3032.86,2525 ; v1(3021.02,3335) 3060.39,3335 ; 3065,3244.61 3065,3340 3065,3455 ; v1(3139.13,3025.87) 3209.72,3025.87 ; 3145,1868.07 3145,1955 3145,2038.09 ; 3145,3765 3145,3827.07 ; 3215,4610 3215,4515 3245,4485 3245,4365 ; v1(3237.56,2767.56) 3237.56,2838.42 ; 3245,3655 3245,3765 ; 3250,2295 3250,2390 ; 3302.24,3090 v1(3380,3090) ; 3445,4365 3445,4610 ; v1(3470,2770) 3470,2833.6 ; 3545,4365 3690,4510 3845,4510 3945,4610 ; 3555,2390 v1(3555,2435) ; 3584.08,3190 3670,3190 ; 3640,2390 3750,2390 3985,2390 ; 3640,2480 3640,2548.94 ; 3715,3002.51 3715,3080 ; 3745,2385 3745,2020 3855,2020 3855,1710 ; 3745,4365 3745,4440 3990,4440 3990,4380 3990,4350 4080,4350 4160,4350 4160,4240 5005,4240 5005,4360 ; 3750,2525 3750,2590.35 ; 3805,3190 3985,3190 3985,2390 ; 3810,3073.11 v1(3810,3130) 3810,3185 ; 3845,3630 3845,3765 ; 3855,1315 4025,1315 ; 3995,4250 4080,4250 ; 4045,1810 4165,1810 4180,1795 4310,1795 ; 4045,1910 4170,1910 4185,1925 4310,1925 ; 4175,4610 4175,4435 4320,4290 4535,4290 4605,4360 ; 4405,3760 4405,3839.32 ; 4505,3630 4505,3760 ; 4505,4360 4505,4440 4675,4610 ; 4535,2680 4545,2670 4810,2670 5140,2670 ; 4535,2730 4535,2285 ; 4695,2290 4705,2280 ; 4705,2285 4535,2285 ; 4705,4360 4705,4410 4905,4610 ; 4713.2,2570 4810,2570 ; 4805,4360 4940,4495 5290,4495 5405,4610 ; 4890,3042.62 4890,3120 ; 4910,2435.12 4910,2535 ; 5100,3260 5420,3260 5550,3390 5620,3390 ; 5100,3350 5410,3350 5550,3490 ; 5105,3635 5105,3760 ; 5150,2285 5150,2510 5150,2760 5290,2900 5290,2965 ; 5310,4370 5410,4370 ; 5320,4141.09 5320,4230 ; 5410,4270 5502.22,4270 ; 5550,2530 5620,2600 5620,3750 5550,3820 ; 5550,2960 5620,2960 ; 3985,2390 3985,2285 4535,2285
  Bottom Layer w40: 2760,1245 v2(2760,1335) ; 2800,1250 v2(2800,1336) ; 2840,1255 v2(2840,1335) ; 3365,1320 3365,1520 ; 3370,1310 3710,1310 ; 3535,1180 3535,1310
  Bottom Layer w50: 2053.9,2528.15 2160,2528.15 ; 2061.58,2118.15 2160,2118.15 ; 2063.07,3350 2160,3350 ; 2066.32,2940 2160,2940 ; 2071.38,3825 2160,3825 ; 2194.26,1770 2315,1770 ; 2227.81,1435 2315,1435 ; 2360.33,3885 2460,3885 ; 2460.94,3884.06 2550,3884.06 2649.61,3884.06 ; 2466.85,4021.85 2550,4021.85 2550,4170 3845,4170 ; 2845,1185 3345,1185 3345,1310 ; 3115,4610 3115,4727.2 ; 3455,1520 3455,1655 ; 3530,1710 3710,1710 4045,1710 4190,1710 4190,1300 ; 3545,1510 3710,1510 ; 3680,1510 3855,1510 4045,1510 4045,1610 ; 3710,1310 3855,1310 ; 3710,1410 3710,1610 ; 3740,3953.32 3740,4035 ; 3845,4070 3925.56,4070 ; 3845,4365 3845,4170 ; 3845,4610 3845,4718.19 ; 3855,1450 3855,1575 ; 4190,1410 4360,1410 4455,1410 4730,1410 ; 4455,1310 4730,1310 4855.97,1310 ; 4575,4610 4575,4716.43 ; 5000,3951.97 5000,4035 ; 5105,3945.97 5105,4070 5207.24,4070 ; 5105,4360 5105,4170 3845,4170 ; 5230,1171.21 5230,1270 ; 5235,1410 5330,1410 ; 5305,4610 5305,4725.92 ; 5330,1310 5444.08,1310 ; 5448.36,4020 5550,4020 ; 5460.97,3590 5550,3590 ; 5473.3,3160 5550,3160 ; 5473.57,2730 5550,2730 ; 5550,1880 5550,1966.18 ; 5650,2270 5650,2520 5690,2560 5690,4585 5770,4585 ; 5750,2155.45 5750,2270
  Bottom Layer w60: 2825,1520 3025,1520
  other v1: 4020,1210 4190,1210 2395,1220 4360,1275 3745,1930 2950,1935 3250,2205 4795,2280 5240,2285 4075,2390 5240,2510 4635,2730 4720,2831.9 4890,2831.61 4720,2888.47 4890,2888.17 4891.61,2940 4720,2945.04 5380,2965 3070,3560 2334.12,4710 2335.92,4820 2924.89,4825 4503.8,4830
  other v2: 3025,1310 3075,1310 2760,1470 2800,1470 2840,1470 3210,1490 3210,1545

## Polygon pours and split planes (outlines as drawn)
no net on Top Layer "Bottom Layer-No Net" (hatched 45Degree grid 10 track 10, pour order 106): 2040,4690 2040,4600 2650,4600 2650,4750 5630,4750 5630,4900 2290,4900 2290,4690 2040,4690
no net on Top Layer "Bottom Layer-No Net" (hatched 45Degree grid 10 track 10, pour order 104): 3770,1450 3840,1450 3840,1330 3960,1330 3960,1100 3770,1100 3770,1450
no net on Top Layer "Bottom Layer-No Net" (hatched 45Degree grid 10 track 10, pour order 100): 3770,1770 3980,1770 3980,1440 4130,1440 4130,1770 4240,1770 4380,1630 4380,1440 4380,1250 4250,1250 4250,1360 4080,1360 3870,1360 3870,1520 3770,1520 3770,1770
no net on Top Layer "Bottom Layer-No Net" (hatched 45Degree grid 10 track 10, pour order 98): 2510,1870 2510,1660 3410,1660 3410,1260 3630,1260 3630,1870 2510,1870
no net on Top Layer "Bottom Layer-No Net" (hatched 45Degree grid 10 track 10, pour order 96): 2260,1300 2260,1270 2690,1270 2690,1470 2610,1470 2610,1370 2236.24,1370 2233.38,1367.14 2233.38,1300 2260,1300
no net on Top Layer "Bottom Layer-No Net" (hatched 45Degree grid 10 track 10, pour order 94): 2021.25,1300 2240,1300 2240,1988.5 2240,1999.58 2010.42,1999.58 2010,2000 2010,1300 2021.25,1300
no net on Top Layer "Bottom Layer-No Net" (hatched 45Degree grid 10 track 10, pour order 92): 5620,4200 5620,2340 5850,2340 5850,4200 5620,4200
no net on Top Layer "Bottom Layer-No Net" (hatched 45Degree grid 10 track 10, pour order 90): 3110,4310 3110,3830 3500,3830 3500,3980 3590,4070 3690,4170 3690,4310 3110,4310
no net on Top Layer "Bottom Layer-No Net" (hatched 45Degree grid 10 track 10, pour order 88): 4370,4300 4370,3820 4760,3820 4760,3980 4860,4080 4950,4170 4950,4300 4370,4300
no net on Top Layer "Bottom Layer-No Net" (hatched 45Degree grid 10 track 10, pour order 86): 5470,4460 5470,4250 5490,4250 5650,4410 5720,4410 5720,4530 5540,4530 5470,4460
no net on Top Layer "Bottom Layer-No Net" (hatched 45Degree grid 10 track 10, pour order 82): 4060,3810 4210,3810 4210,4550 4030,4550 4030,4411.84 4138.16,4411.84 4140,4410 4140,4190 4033.42,4190 4030,4186.58 4024.74,4181.32 4024.74,3810 4060,3810
no net on Top Layer "Bottom Layer-No Net" (hatched 45Degree grid 10 track 10, pour order 78): 3760,4550 3760,4430 3920,4430 3920,3810 4030,3810 4030,4550 3760,4550
no net on Top Layer "Bottom Layer-No Net" (hatched 45Degree grid 10 track 8, pour order 0): 3020,3130 3500,3130 3500,2660 3020,2660 3020,3130
no net on Top Layer "Bottom Layer-No Net" (hatched 45Degree grid 10 track 10, pour order 110): 4540,2970 4540,2810 4990,2810 4990,2970 4540,2970
no net on Bottom Layer "Bottom Layer-No Net" (hatched 45Degree grid 10 track 10, pour order 76): 2560,3500 2560,3810 2560,3820 2970,3820 2970,3860 5190.97,3860 5191.79,3859.18 5191.79,3820 3080,3820 3080,3630 3010,3630 3010,3476.69 2571.59,3476.69 2560,3465.1 2560,3500
no net on Bottom Layer "Bottom Layer-No Net" (hatched 45Degree grid 10 track 10, pour order 74): 2620,3850 2620,3980 2940,3980 3060,4100 3070,4110 3090,4110 3660,4110 3660,3970 3910,3970 3910,4110 4930,4110 4930,3970 4940,3970 5130,3970 5130,3890 2940,3890 2940,3850 2620,3850
no net on Bottom Layer "Bottom Layer-No Net" (hatched 45Degree grid 10 track 10, pour order 70): 5310,2330 5310,2184.59 5314.4,2180.18 5400,2180.18 5400,2349.89 5399.89,2350 5310,2350 5310,2330
no net on Bottom Layer "Bottom Layer-No Net" (hatched 45Degree grid 10 track 10, pour order 68): 2010,2000 2240,2000 2240,1300 2010,1300 2010,2000
no net on Bottom Layer "Bottom Layer-No Net" (hatched 45Degree grid 10 track 10, pour order 66): 3020,1880 3270,1880 3270,1650 2390,1650 2390,1880 3020,1880
no net on Bottom Layer "Bottom Layer-No Net" (hatched 45Degree grid 10 track 10, pour order 60): 2260,3850 2260,3530 2390,3530 2390,3889.1 2387.24,3886.34 2260,3886.34 2260,3850
no net on Bottom Layer "Bottom Layer-No Net" (hatched 45Degree grid 10 track 10, pour order 58): 2390,3880 2390,4270 2660,4270 2660,4660 2010,4660 2010,2060 2080,2060 2080,4110 2260,4110 2260,3880 2390,3880
no net on Bottom Layer "Bottom Layer-No Net" (hatched 45Degree grid 10 track 10, pour order 50): 5840,1910 5840,1320 5590,1320 5590,1110 5150,1110 5150,1199.82 5150.18,1200 5400,1200 5400,1487.22 5397.22,1490 5660,1490 5660,1939.38 5659.38,1940 5840,1940 5840,1910
no net on Bottom Layer "Bottom Layer-No Net" (hatched 45Degree grid 10 track 10, pour order 48): 5480,4170 5480,4700 2260,4700 2260,4910 5590,4910 5590,4100 5485.78,4100 5480,4094.22 5480,4170
no net on Bottom Layer "Bottom Layer-No Net" (hatched 45Degree grid 10 track 10, pour order 46): 5180,3400 5370,3400 5480,3510 5480,4160 5180,4160 5180,3400
no net on Bottom Layer "Bottom Layer-No Net" (hatched 45Degree grid 10 track 10, pour order 44): 5480,3020 5480,2350 5310,2350 5310,2780 5440,2910 5440,3018.3 5438.3,3020 5479.42,3020
no net on Bottom Layer "Bottom Layer-No Net" (hatched 45Degree grid 10 track 10, pour order 42): 5040,3060 5070,3060 5070,3180 5480,3180 5480,3020 5042.33,3020 5040,3017.67 5039.9,3017.78 5039.9,3060
no net on Bottom Layer "Bottom Layer-No Net" (hatched 45Degree grid 10 track 10, pour order 40): 4860,3060 4860,2730 5100,2730 5100,2760 5040,2820 5040,3060 4860,3060
no net on Bottom Layer "Bottom Layer-No Net" (hatched 45Degree grid 10 track 10, pour order 36): 4990,2490 4990,2620 5090,2620 5090,2470 4997.1,2470 4990,2462.9 4990,2490
no net on Bottom Layer "Bottom Layer-No Net" (hatched 45Degree grid 10 track 10, pour order 34): 4600,2600 4740,2600 4740,2470 5090,2470 5090,2230 5090,2190 5840,2190 5840,1940 5460,1940 5460,1490 5150,1490 5150,1110 4840,1110 4840,1250 4800,1250 4800,1950 4840,1950 4860,1950 4860,2340 4600,2340 4600,2600
no net on Bottom Layer "Bottom Layer-No Net" (hatched 45Degree grid 10 track 10, pour order 32): 3000,2330 3200,2330 3200,2150 3310,2150 3310,2330 3690,2330 3690,2250 3620,2250 3620,2020 3020,2020 3020,2110 3000,2110 3000,2330
no net on Bottom Layer "Bottom Layer-No Net" (hatched 45Degree grid 10 track 10, pour order 30): 2470,3480 3010,3480 3010,3400 2870,3400 2870,3270 2910,3270 2910,3170 3000,3170 3000,3040 2810,3040 2810,3340 2444.13,3340 2445.55,3341.42 2445.55,3480 2470,3480
no net on Bottom Layer "Bottom Layer-No Net" (hatched 45Degree grid 10 track 10, pour order 28): 2890,2030 2890,2330 2780,2330 2780,2670 2780,2680 2560,2680 2550,2690 2550,2910 2450,2910 2450,3340 2450,3480 2330,3480 2330,2030 2890,2030
no net on Bottom Layer "Bottom Layer-No Net" (hatched 45Degree grid 10 track 10, pour order 26): 3020,2560 3020,2480 3320,2480 3360,2520 3580,2520 3580,2540 3680,2540 3680,2580 3940,2580 3940,2820 3527.11,2820 3527.11,2637.11 3520,2630 3026.85,2630 3020,2636.85 3020,2560
no net on Bottom Layer "Bottom Layer-No Net" (hatched 45Degree grid 10 track 10, pour order 24): 3330,3030 3540,3030 3540,3149.23 3540.71,3149.94 3610,3149.94 3610,3110 3650,3110 3650,3020 3940,3020 3940,2960 3304.96,2960 3304.96,3023.74 3298.7,3030 3330,3030
no net on Bottom Layer "Bottom Layer-No Net" (hatched 45Degree grid 10 track 10, pour order 22): 3190,3020 3190,3270 3250,3330 3250,3470 3760,3470 3850,3380 3850,3260 3610,3260 3610,3140 3312,3140 3310,3142 3310,2956.45 3303.55,2950 3301.24,2947.69 3190,2947.69 3190,3020
no net on Bottom Layer "Bottom Layer-No Net" (hatched 45Degree grid 10 track 10, pour order 18): 2960,2580 2960,2920 3120,2920 3120,2960 3940,2960 3940,2820 3190,2820 3190,2580 2960,2580
no net on Bottom Layer "Bottom Layer-No Net" (hatched 45Degree grid 10 track 10, pour order 108): 4540,2790 4540,3410 4640,3510 5030,3510 5030,3400 4620,3400 4620,3140 4770,3140 4770,2790 4540,2790

## Silkscreen, mask and mechanical layers (free items; w line width, h text height)
Top Overlay:
  lines w10: 1988.19,1062.99 5866.14,1062.99 5866.14,4960.63 1988.19,4960.63 1988.19,1062.99
  text "VCC" at 5605,4570 h30
  text "GND" at 5605,4470 h30
  text "SWCLK" at 5545,4370 h30
  text "SWDIO" at 5550,4260 h30
  text "GND" at 5410,3620 h30
  text "CANL" at 5380,3540 h30
  text "CANH" at 5380,3460 h30
  text "BallBot-F407" at 2360,2580 h30
  text "V0.0" at 2360,2515.56 h30
  text "ZJ Xi'an 251201" at 2360,2448.32 h30
  text "SDA" at 4140,2200 h30
  text "SCL" at 4140,2100 h30
  text "TXD" at 5470,2030 h30 r90
  text "RXD" at 5570,2030 h30 r90
  text "VCC" at 5670,2030 h30 r90
  text "GND" at 5770,2030 h30 r90
  text "FSYNC" at 4140,2000 h30
  text "INT2" at 4140,1900 h30
  text "GND" at 5390,1860 h30
  text "INT1" at 4140,1790 h30
  text "GND" at 2560,1780 h30 r90
  text "TXD" at 2660,1780 h30 r90
  text "RXD" at 2765,1780 h30 r90
  text "GND" at 3160,1780 h30 r90
  text "NSS" at 3260,1780 h30 r90
  text "SCK" at 3360,1780 h30 r90
  text "MISO" at 3460,1760 h30 r90
  text "MOSI" at 3560,1760 h30 r90
  text "VCC" at 5390,1760 h30
  text "VCC" at 4140,1700 h30
  text "RXD" at 5390,1660 h30
  text "AD0" at 4140,1600 h30
  text "TXD" at 5390,1560 h30
  text "GND" at 4140,1500 h30